# EAGLE board Power Rail (EAGLE 9.6.2)
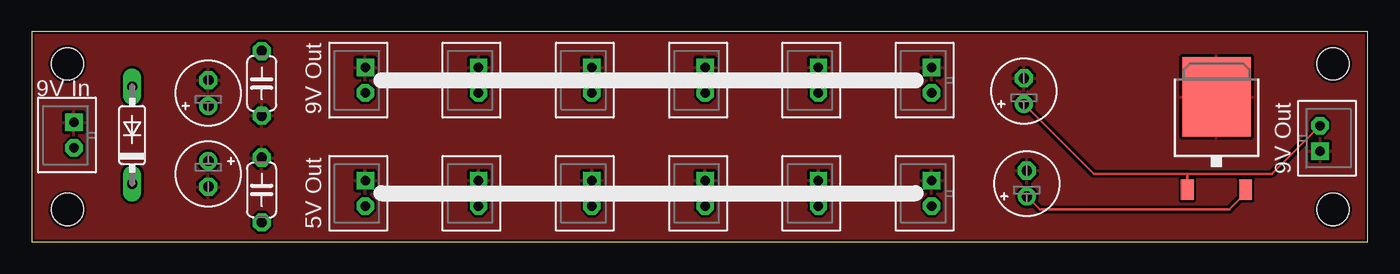
[diagram p0: board, top side]
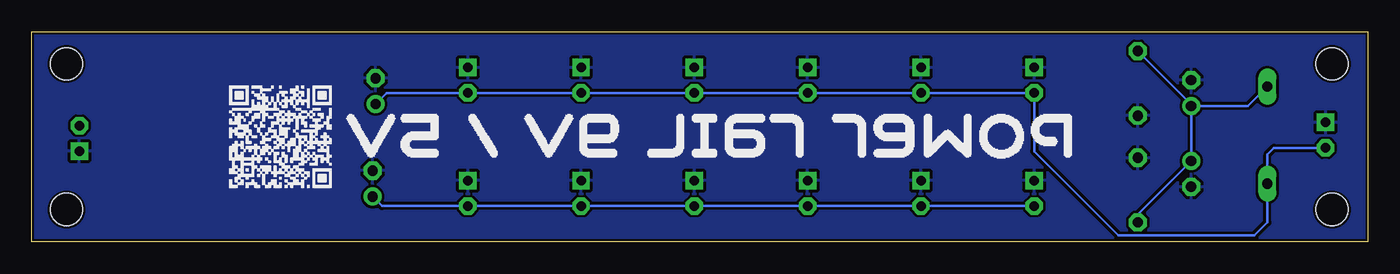
[diagram p1: board, bottom side, seen from below]

Size 104.83 x 16.5 mm. Coordinates in mm from the lower left corner, seen from the top.
Outline: 0,0 104.83,0 104.83,16.5 0,16.5 0,0
Copper layers (1*16): Top 0.035mm / dielectric 1.5mm / Bottom 0.035mm
Design rules "SparkFun": minimum track width 8mil, minimum drill 20mil, track to track 8mil, track to pad 8mil, pad to pad 8mil, via to via 8mil, smd to smd 8mil, copper to edge 8mil, drill to drill 8mil, minimum pad ring 12mil, minimum via ring 10mil, stop-mask expansion 4mil, vias tented up to drill 20mil, thermal gap 10mil
Holes 2.54 mm at 2.79,13.97 2.79,2.54 102.11,13.97 102.11,2.54

## Footprints (pad centres in the part's own frame; a part is rotated, then mirrored left to right if it is on the bottom)
B2B-PH-K-S = drill 0.75 pad 1.3 square: 1 1,0 | drill 0.75 pad 1.3 octagon: 2 -1,0
E2-5 = drill 0.813 pad 1.27: + -1.016,0 | drill 0.813 pad 1.27 octagon: - 1.016,0
C050-024X044 = drill 0.813 octagon: 1 -2.54,0; 2 2.54,0
DO35-7 = drill 0.813 long: A 3.81,0; C -3.81,0
TO252 = smd 1 x 1.6: 1 -2.28,-4.8; 2 2.28,-4.8 | smd 5.4 x 6.2: 3 0,2.5

## Placement (x,y rotation side)
5V1  B2B-PH-K-S  [B2B-PH-K-S]  70.61,3.81 90 top
5V2  B2B-PH-K-S  [B2B-PH-K-S]  26.16,3.81 90 top
5V3  B2B-PH-K-S  [B2B-PH-K-S]  35.05,3.81 90 top
5V4  B2B-PH-K-S  [B2B-PH-K-S]  43.94,3.81 90 top
5V5  B2B-PH-K-S  [B2B-PH-K-S]  52.83,3.81 90 top
5V6  B2B-PH-K-S  [B2B-PH-K-S]  61.72,3.81 90 top
9V  B2B-PH-K-S  [B2B-PH-K-S]  3.3,8.38 90 top
9V1  B2B-PH-K-S  [B2B-PH-K-S]  26.16,12.7 90 top
9V2  B2B-PH-K-S  [B2B-PH-K-S]  35.05,12.7 90 top
9V3  B2B-PH-K-S  [B2B-PH-K-S]  43.94,12.7 90 top
9V4  B2B-PH-K-S  [B2B-PH-K-S]  52.83,12.7 90 top
9V5  B2B-PH-K-S  [B2B-PH-K-S]  61.72,12.7 90 top
9V6  B2B-PH-K-S  [B2B-PH-K-S]  70.61,12.7 90 top
9V8  B2B-PH-K-S  [B2B-PH-K-S]  101.09,8.13 270 top
C1  10uf  [E2-5]  77.85,11.84 90 top
C2  1uf  [E2-5]  78.08,4.57 90 top
C3  22uf  [E2-5]  13.84,11.68 90 top
C4  22uf  [E2-5]  13.84,5.33 270 top
C5  100nf  [C050-024X044]  18.03,12.45 270 top
C6  100nf  [C050-024X044]  18.03,4.06 90 top
D2  1N4148  [DO35-7]  7.87,8.38 90 top
IC2  7805DT  [TO252]  92.96,8.89 0 top

## Library data of the parts
5V1-5V6 9V 9V1-9V6 9V8 = con-JST PH
C1-C6 = rcl; SPICEPREFIX: C
D2 = diode
IC2 = linear4

## Nets
+5V: 5V1.2 5V2.2 5V3.2 5V4.2 5V5.2 5V6.2 C2.+ IC2.2
+9V: C3.+ C4.+ C5.1 C6.1 D2.A
GND: 5V1.1 5V2.1 5V3.1 5V4.1 5V5.1 5V6.1 9V1.1 9V2.1 9V3.1 9V4.1 9V5.1 9V6.1 9V8.1 9V.1 C1.- C2.- C3.- C4.- C5.2 C6.2 IC2.3
N$4: 9V1.2 9V2.2 9V3.2 9V4.2 9V5.2 9V6.2 9V8.2 9V.2 C1.+ D2.C IC2.1

## Tracks (layer width: path | path; a pad name or v marks a point on that pad's centre or on a via)
+5V
  Top 0.203: C2.+ 79.1,2.54 93.98,2.54 95.24,3.8 IC2.2
  Bottom 0.203: 5V2.2 5V3.2 5V4.2 5V5.2 5V6.2 5V1.2 77.34,2.81 77.34,2.82 C2.+
+9V
  Bottom 0.203: C6.1 18.03,2.16 C4.+ C3.+ | D2.A 9.4,10.67 C3.+ | C5.1 13.84,10.8 C3.+
GND
  pour Top: 0,16.51 104.9,16.51 104.9,0 0,0
  pour Bottom: 0,16.51 104.9,16.51 104.9,0 0,0
N$4
  Top 0.203: 9V8.2 97.3,5.33 90.68,5.33 | IC2.1 90.68,5.33 | C1.+ 83.34,5.33 90.68,5.33
  Bottom 0.203: 9V.2 7.35,7.38 7.87,6.86 D2.C 7.87,1.52 8.89,0.51 19.56,0.51 26.16,7.11 9V1.2 9V2.2 9V3.2 9V4.2 9V5.2 9V6.2 76.97,11.7 C1.+

## Text on the board
tPlace: 9V In | 9V Out | 9V Out | 5V Out